# Altium PCB fullflex-2.PcbDoc
Units mil, origin at the board's own origin, x right, y up, seen from the top; angles counter-clockwise.
Board outline 1528.63 x 1229.51 mil, 4 copper layers (CuNiAu Pads, metal3, metal2, metal1), stack 25.125 mil thick; 51 components, 23 nets, 174 pads, 209 vias.
Unrouted connection lines stored in the file: 5.
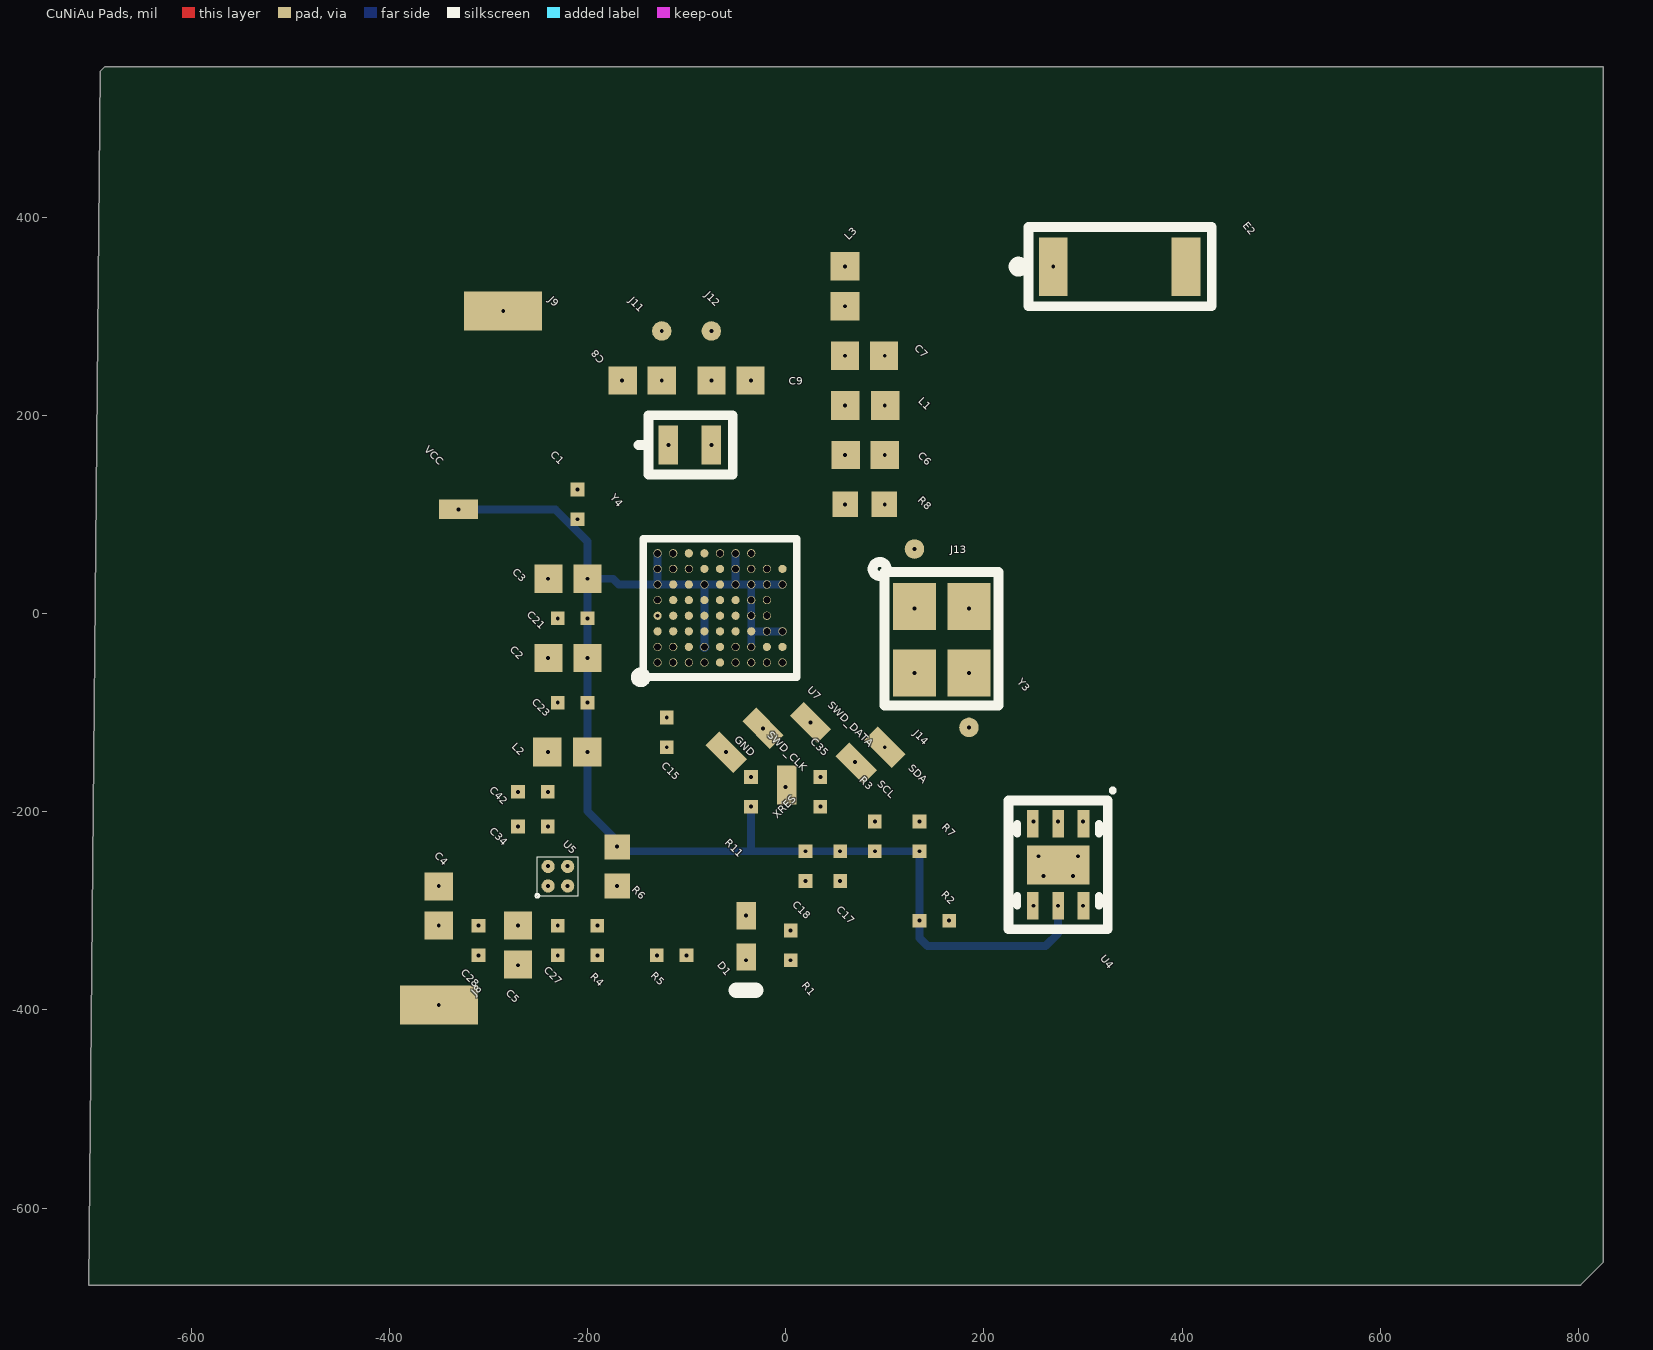
[diagram p0: CuNiAu Pads view]
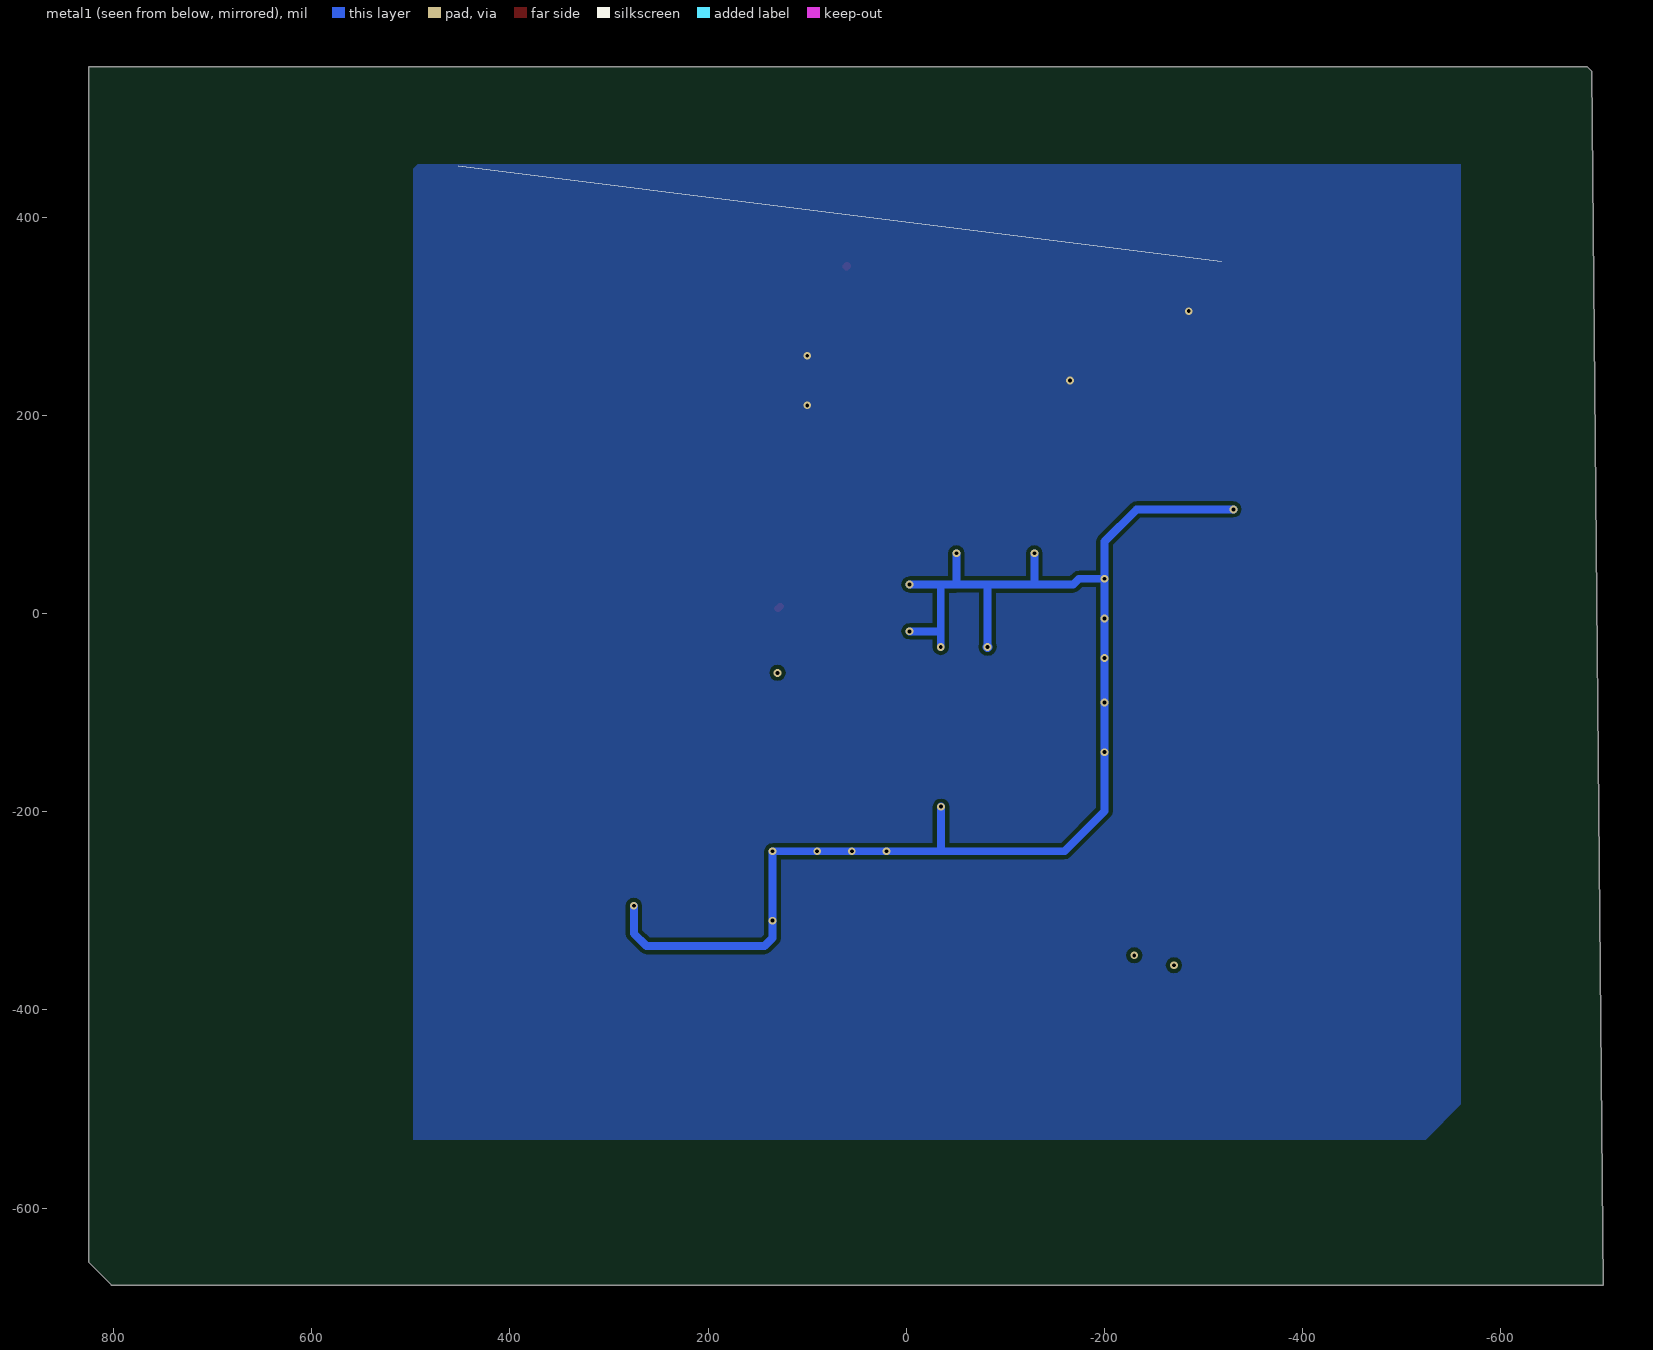
[diagram p1: metal1 view, seen from below]
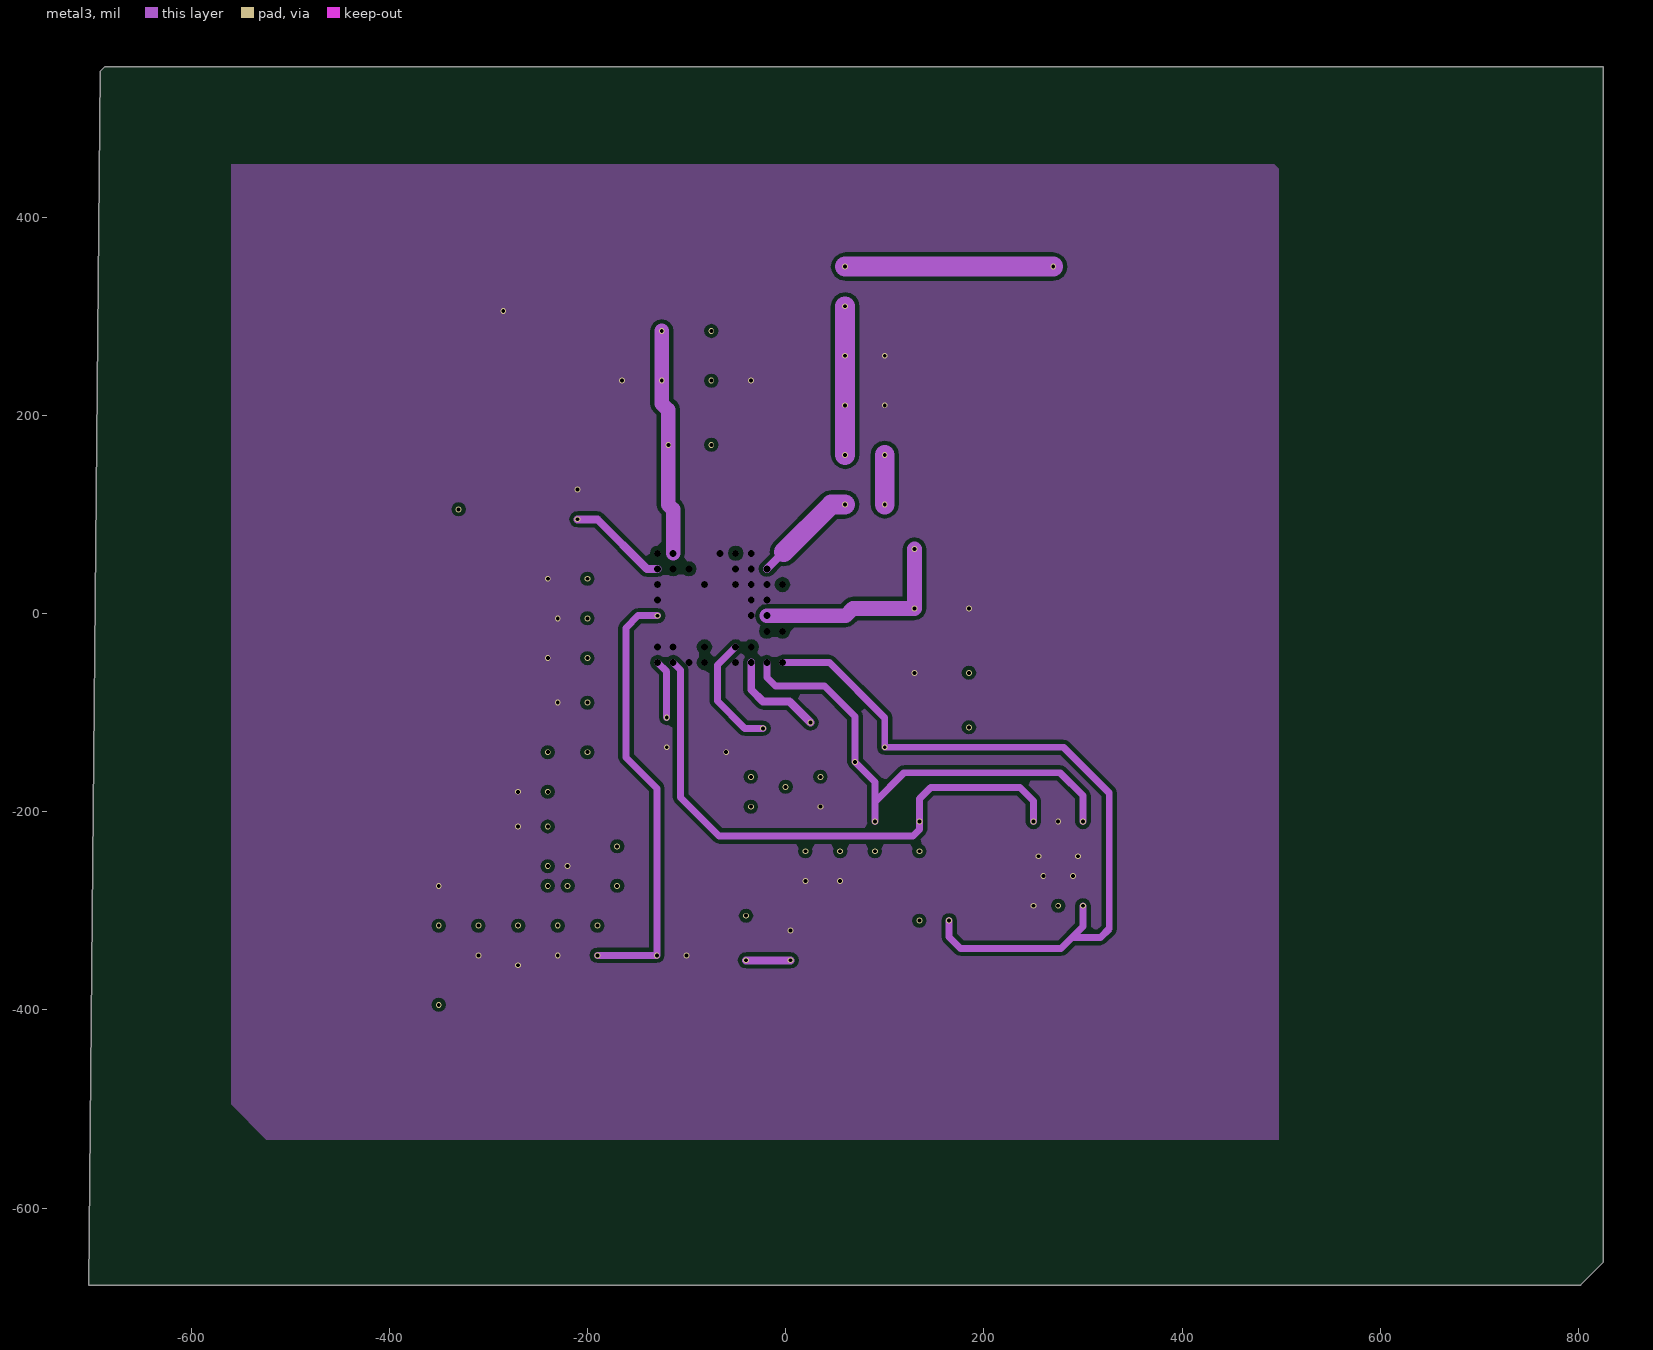
[diagram p2: metal3]
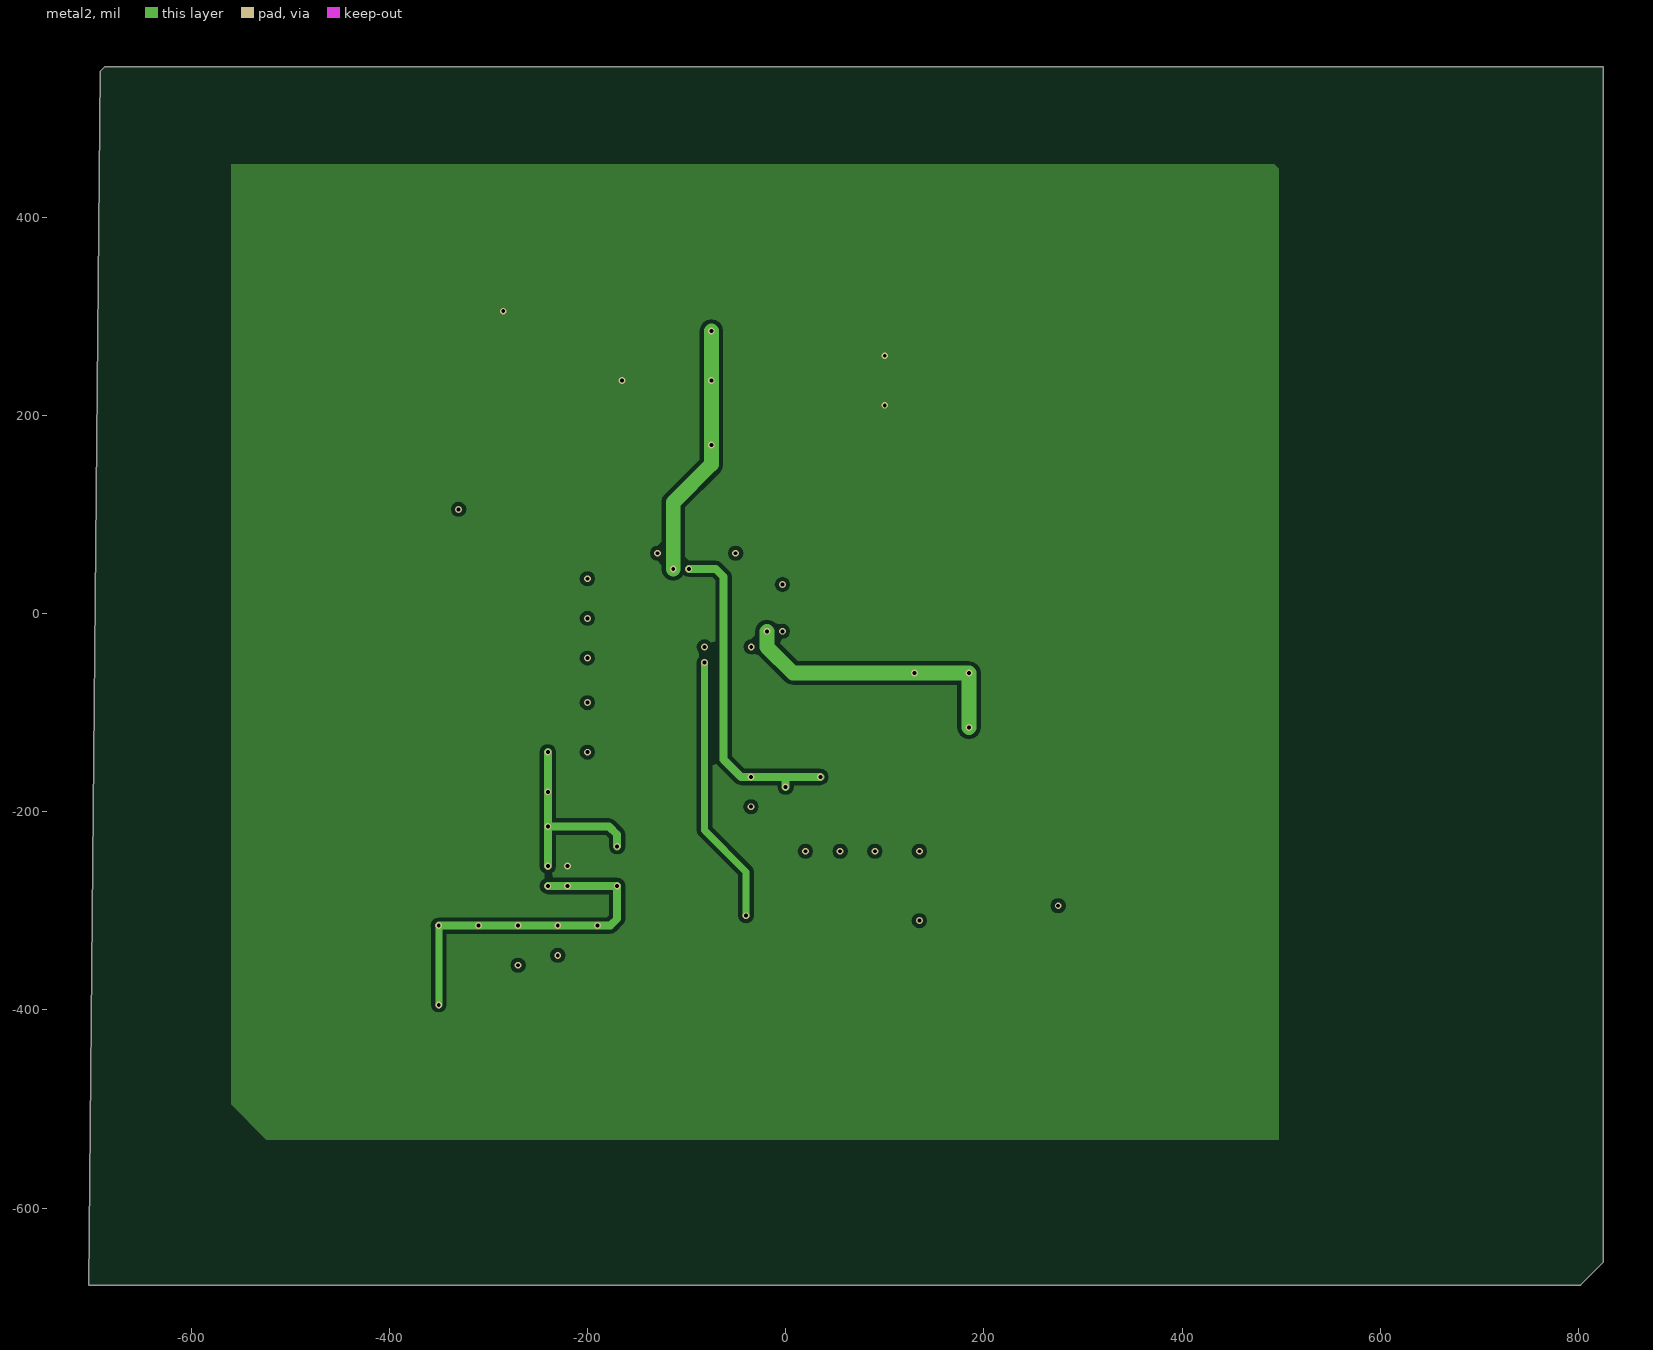
[diagram p3: metal2]

## Layer stack, top to bottom
pad expose: solder mask 0.4, Solder Resist, Dk 3.5
CuNiAu Pads: signal copper 0.035
pi4: core 10, polyimide, Dk 3.5
metal3: signal copper 0.03
pi3: core 10, polyimide, Dk 3.5
metal2: signal copper 0.03
pi2: prepreg 5, poylimide, Dk 3.5
metal1: signal copper 0.03
pi1: solder mask 0.4, Solder Resist, Dk 3.5

## Board outline
-691.85,546.89 -686.89,551.84 825.22,551.84 825.22,-654.53 802.08,-677.67 -703.41,-677.67

## Design rules (kind name [scope] priority, off if disabled: settings)
Clearance "CuNiAu Pads" [All] p1: gap=4 ignorepadtopadclearanceinfootprint=TRUE
Clearance "polygon clear" [InNetClass('All Nets') vs InNetClass('All Nets')] p2: gap=4 ignorepadtopadclearanceinfootprint=TRUE
ComponentClearance ComponentClearance_1 [InComponentClass('Top Side Components') vs InComponentClass('Top Side Components')] p1: gap=18.66 collisioncheckmode=3 verticalgap=10 showdistances=FALSE
ComponentClearance [HasFootprint('BATTERY_PAD') vs HasFootprint('POGO-PIN-PAD')] p2: gap=0 collisioncheckmode=3 verticalgap=100000 showdistances=FALSE
ComponentClearance pogoPadClearance [HasFootprint('POGO-PIN-PAD')] p3: gap=0 collisioncheckmode=3 verticalgap=10 showdistances=FALSE
DiffPairsRouting [All] p1: maxlimit=10 minlimit=3.15 mostfreqgap=3.94 toplayer_minwidth=7.01 toplayer_maxwidth=15 toplayer_prefwidth=15 midlayer1_minwidth=7.01 midlayer1_maxwidth=15 midlayer1_prefwidth=15 midlayer2_minwidth=7.01 midlayer2_maxwidth=15 midlayer2_prefwidth=15 bottomlayer_minwidth=7.01 bottomlayer_maxwidth=15 bottomlayer_prefwidth=15 maxuncoupledlength=500
FanoutControl Fanout_BGA [IsBGA] p1: bgadir=Out bgaviamode=Closest fanoutstyle=BGA fanoutdirection=OutOnly viagrid=1 // Fanout_BGA (Default Rule)
FanoutControl Fanout_Default [All] p5: bgadir=Out bgaviamode=Centered fanoutstyle=BGA fanoutdirection=Alternating viagrid=1 // Fanout_Default (Default Rule)
HoleSize [All] p1: absolutevalues=TRUE maxlimit=21.26 minlimit=1 maxpercent=80.000 minpercent=20.000
MatchedLengths MatchLengths_xSignals_U7_Y3,Y4 [InxSignalClass('xSignals_U7_Y3,Y4_MatchLengthsClass')] p1: tolerance=100 checknetsindiffpair=FALSE checkdiffpairvsdiffpair=TRUE checkxsignals=TRUE checkothers=TRUE
MatchedLengths [All] p2: tolerance=1000 checknetsindiffpair=TRUE checkdiffpairvsdiffpair=FALSE checkxsignals=FALSE checkothers=FALSE
MinimumAnnularRing [All] p1: minimumring=0
ParallelSegment [All] p1: limit=10000 gap=10
PlaneClearance [All] p1: clearance=4
PolygonConnect [All] p1: connectstyle=Direct reliefconductorwidth=10 reliefentries=4 polygonreliefangle="90 Angle" airgapwidth=10
RoutingVias [All] p1 off: holewidth=5.32 width=5.34 viastyle="Through Hole" minholewidth=5.32 minwidth=5.34 maxholewidth=7.48 maxwidth=7.91
SMDNeckDown [All] p1: percent=50.000
SolderMaskExpansion [All] p1: expansion=-1.97
UnRoutedNet [All] p1: checkbadconnections=TRUE
ViasUnderSMD [All] p1: allowed=TRUE
Width [All] p1: maxlimit=98.43 minlimit=7 preferedwidth=8 toplayer_maxwidth=9 midlayer2_maxwidth=19.68 bottomlayer_maxwidth=59.06 minimp=50.000000 maximp=50.000000 favimp=50.000000 checkconnectedcopper=TRUE
23 further rules are at their usual default settings.

## Classes and differential pairs
differential pair XTAL_LF: +XTAL_LF_P -XTAL_LF_N
differential pair XTAL_HF: +XTAL_HF_P -XTAL_HF_N

## Components (designator, comment, footprint, x,y, rotation, side; value= is the part's Value field where it differs from the comment)
C1 "Capacitance" CAP_0201(0603)_M -210,110 r90 top
C2 "Capacitance" CAP_0402(1005)_M -219.68,-45 r180 top
C3 "Capacitance" CAP_0402(1005)_M -219.68,35 r180 top
C4 "Capacitance" CAP_0402(1005)_M -350,-295.32 r90 top
C5 "Capacitance" CAP_0402(1005)_M -270,-334.68 r270 top
C6 "Capacitance" CAP_0402(1005)_M 80.31,160 r180 top
C7 "Capacitance" CAP_0402(1005)_M 79.69,260 r0 top
C8 "Capacitance" CAP_0402(1005)_M -144.68,235 r180 top
C9 "Capacitance" CAP_0402(1005)_M -55.32,235 r0 top
C15 "Capacitance" CAP_0201(0603)_M -120,-120 r270 top
C17 "Capacitance" CAP_0201(0603)_M 55,-255 r270 top
C18 "Capacitance" CAP_0201(0603)_M 20,-255 r270 top
C21 "Capacitance" CAP_0201(0603)_M -215,-5 r180 top
C23 "Capacitance" CAP_0201(0603)_M -215,-90 r180 top
C27 "Capacitance" CAP_0201(0603)_M -230,-330 r270 top
C28 "Capacitance" CAP_0201(0603)_M -310,-330 r270 top
C34 "Capacitance" CAP_0201(0603)_M -255,-215 r180 top
C35 "Capacitance" CAP_0201(0603)_M 35,-180 r270 top
C42 "Capacitance" CAP_0201(0603)_M -255,-180 r180 top
D1 "#NAME?" LED_0402(1005) -40,-325 r270 top
E2 "2450AT18B100" 2450AT18B100 270,350 r0 top
GND "*" POGO-PIN-PAD -60,-140 r45 top
J8 "*" BATTERY_PAD -350,-395 r135 top
J9 "*" BATTERY_PAD -285,305 r135 top
J11 "*" POGO-CLOCK-PAD -125,285 r45 top
J12 "*" POGO-CLOCK-PAD -75,285 r45 top
J13 "*" POGO-CLOCK-PAD 130,65 r45 top
J14 "*" POGO-CLOCK-PAD 185,-115 r45 top
L1 "Inductance" IND_0402(1005)_M 80.28,210 r180 top
L2 "Inductance" IND_0402(1005)_M -220.28,-140 r0 top
L3 "Inductance" IND_0402(1005)_M 60,330.28 r90 top
R1 "Resistance" RES_0201(0603)_M 5,-335 r90 top
R2 "Resistance" RES_0201(0603)_M 150,-310 r0 top
R3 "Resistance" RES_0201(0603)_M 90,-225 r90 top
R4 "Resistance" RES_0201(0603)_M -190,-330 r270 top
R5 "Resistance" RES_0201(0603)_M -115,-345 r0 top
R6 "Resistance" RES_0402(1005)_M -170,-255.32 r90 top
R7 "Resistance" RES_0201(0603)_M 135,-225 r270 top
R8 "Resistance" RES_0402(1005)_M 79.69,110 r0 top
R11 "Resistance" RES_0201(0603)_M -35,-180 r90 top
SCL "*" POGO-PIN-PAD 71.22,-151.18 r225 top
SDA "*" POGO-PIN-PAD 100,-135 r45 top
SWD_CLK "*" POGO-PIN-PAD -22.83,-115.91 r45 top
SWD_DATA "*" POGO-PIN-PAD 25,-110 r45 top
U4 "*" WSON-6 275,-253.66 r270 top
U5 "ADP172" ADP172 -229.84,-265.16 r90 top
U7 "*" WLCSP-68 -66.2,5.57 r90 top
VCC "*" POGO-PIN-PAD -330,105 r270 top
XRES "*" POGO-PIN-PAD 0.96,-173.35 r180 top
Y3 "ECX-2236" ECX-2236 129.88,6.93 r270 top
Y4 "32.768KHz" ABS05 -118.4,170 r0 top

## Footprints (in the part's own frame and the unit in brackets; to place one, negate y for a bottom-side part, rotate by r counter-clockwise, add the part's x,y. Pads: shape width x height; smd on the part's side, far side on the other; paste and mask are expansions set on the pad)
2450AT18B100 [mm] "2.4GHz Mini Antenna SMD, 50 ohm Resistence"
  rect 0.74x1.5 smd mask+0.03: 1(0,0) 2(3.406,0)
  silkscreen extent -1.02,-1.02 4.06,1.02, body extent -0.05,-0.9 3.35,0.9, height 1.4
ABS05 [mm] "32.768 kHz CRYSTAL 12.5 PF +/-20ppm"
  rect 0.5x1 smd mask+0.1: 1(0,0) 2(1.102,0)
  silkscreen extent -0.76,-0.76 1.65,0.76, body extent -0.25,-0.5 1.35,0.5, height 0.5
ADP172 [mm] "4-Ball WLCSP, CB-4-4"
  round 0.34 smd paste+0.01 mask+0.01: A1(-0.25,0.25) A2(0.25,0.25) B1(-0.25,-0.25) B2(0.25,-0.25)
  silkscreen extent -0.55,-0.53 0.5,0.57, body extent -0.48,-0.48 0.48,0.48, height 0.69
BATTERY_PAD [mm]
  rect 1x2 smd rot 135: 1(0,0)
CAP_0201(0603)_M [mm] "Chip Capacitor, Body 0.6x0.3mm, Height 0.33mm, IPC Low Density"
  rect 0.35x0.35 smd mask+0: 1(-0.381,0) 2(0.381,0)
  body extent -0.32,-0.17 0.31,0.16, height 0.33
CAP_0402(1005)_M [mm] "Chip Capacitor, Body 1.0x0.5mm, Height 0.6mm, IPC Low Density"
  rect 0.72x0.72 smd: 1(-0.5,0) 2(0.5,0)
  body extent -0.55,-0.3 0.55,0.3, height 0.6
ECX-2236 [mm] "48 MHz CRYSTAL 2.5X2.0mm"
  rect 1.2x1.1 smd mask+0.05: 1(0,0) 2(1.7,0) 4(0,1.4)
  rect 1.2x1.1 smd paste+0 mask+0.05: 3(1.7,1.4)
  silkscreen extent -1.14,-1.07 2.54,2.16, body extent -0.36,-0.24 2.14,1.76, height 0.8
IND_0402(1005)_M [mm] "Chip Inductor, 2-Leads, Body 1.1x0.6mm, IPC Low Density"
  rect 0.73x0.74 smd: 1(-0.515,0) 2(0.515,0)
  body extent -0.55,-0.3 0.55,0.3, height 0.45
LED_0402(1005) [mm] "SMD, 2-Leads, Body 1x0.5mm"
  rect 0.7x0.5 smd: A(-0.508,0) K(0.55,0)
  silkscreen extent 1.4,-0.25 1.4,0.25, body extent -0.5,-0.25 0.5,0.25, height 0.6
POGO-CLOCK-PAD [mm]
  round 0.5 smd: 1(0,0)
POGO-PIN-PAD [mm]
  rect 0.5x1 smd: 1(0,0)
  body extent -0.16,-0.31 0.17,0.32, height 0.33
RES_0201(0603)_M [mm] "Chip Resistor, Body 0.6x0.3mm, IPC Low Density"
  rect 0.35x0.35 smd mask-0.05: 1(-0.381,0)
  rect 0.35x0.35 smd mask-0.5: 2(0.381,0)
  body extent -0.31,-0.16 0.31,0.16, height 0.3
RES_0402(1005)_M [mm] "Chip Resistor, 2-Leads, Body 1.05x0.55mm, IPC Low Density"
  rect 0.65x0.65 smd: 1(-0.5,0) 2(0.5,0)
  body extent -0.53,-0.28 0.53,0.28, height 0.4
WLCSP-68 [mm] "PSOC 4 BLE CY8C4247FNI-BL483 N40P8X9_352X391X55"
  round 0.21 smd mask+0: A1(-1.4,1.6) A2(-1,1.6) A3(-0.6,1.6) A4(-0.2,1.6) A5(0.2,1.6) A6(0.6,1.6) A7(1,1.6) A8(1.4,1.6) B1(-1.4,1.2) B2(-1,1.2) B3(-0.6,1.2) B4(-0.2,1.2) B5(0.2,1.2) B6(0.6,1.2) B7(1,1.2) B8(1.4,1.2) C1(-1.4,0.8) C2(-1,0.8) C3(-0.6,0.8) C5(0.2,0.8) C6(0.6,0.8) C7(1,0.8) C8(1.4,0.8) D1(-1.4,0.4) D2(-1,0.4) D3(-0.6,0.4) D4(-0.2,0.4) D5(0.2,0.4) D6(0.6,0.4) D7(1,0.4) D8(1.4,0.4) E1(-1.4,0) E2(-1,0) E3(-0.6,0) E4(-0.2,0) E5(0.2,0) E6(0.6,0) E7(1,0) E8(1.4,0) F1(-1.4,-0.4) F2(-1,-0.4) F3(-0.6,-0.4) F4(-0.2,-0.4) F5(0.2,-0.4) F6(0.6,-0.4) F7(1,-0.4) F8(1.4,-0.4) G1(-1.4,-0.8) G2(-1,-0.8) G3(-0.6,-0.8) G4(-0.2,-0.8) G5(0.2,-0.8) G6(0.6,-0.8) G7(1,-0.8) G8(1.4,-0.8) H1(-1.4,-1.2) H2(-1,-1.2) H3(-0.6,-1.2) H4(-0.2,-1.2) H5(0.2,-1.2) H6(0.6,-1.2) H7(1,-1.2) J1(-1.4,-1.6) J2(-1,-1.6) J3(-0.6,-1.6) J6(0.6,-1.6) J7(1,-1.6)
  round 0.21 smd mask-0.05: C4(-0.2,0.8)
  silkscreen extent -1.9,-1.97 1.77,2.16, body extent -1.77,-1.97 1.77,1.97, height 0.55
WSON-6 [mm] "SON, 6-Leads, Body 2x2mm, Pitch 0.65mm, Thermal Pad 1X1.6mm"
  rect 0.7x0.3 smd: 1(-1.05,0.65) 2(-1.05,0) 3(-1.05,-0.65) 4(1.05,-0.65) 5(1.05,0) 6(1.05,0.65)
  rect 1x1.6 smd: 7(0,0)
  silkscreen extent -1.95,-1.27 1.65,1.45, body extent -1,-1 1,1, height 0.8

## Part data
C1 C15 C17 C18 C21 C23 C27 C28 C34 C35 C42: library part C-0201(0603), "___ OHM ___ mW 0201(0603) SMD"
C2 C3 C4 C5 C6 C7 C8 C9: library part C-0402(1005), "___ OHM ___ mW 0402(1005) SMD"
D1: library part LED_0402(1005), "LED, 0402(1005) SMD"
E2: "2.4 GHz BLE Antenna", Case/Package=CSMD, Frequency=2.45GHz, Manufacturer=Johanson, Manufacturer Part Number=2450AT18B100E, Max Frequency=2.5GHz, Max Power Dissipation=3W, Package Quantity=1, Supplier Part Number 1=712-1006-1-ND, Bandwidth=100MHz, ComponentLink1Description=https://datasheet.ciiva.com/1124/1318299-1124918.pdf, ComponentLink1URL=https://datasheet.ciiva.com/1124/1318299-1124918.pdf, ComponentLink2Description=https://datasheet.ciiva.com/24025/antenna-2450at18b100-242422-24025839.pdf, ComponentLink2URL=https://datasheet.ciiva.com/24025/antenna-2450at18b100-242422-24025839.pdf, Contact Plating=Tin, Description 1="JOHANSON TECHNOLOGY         2450AT18B100E             ANTENNA, CERAMIC, 2.45GHZ", Gain=-0.5dB, Height=0.051inch, Impedance=50R, Length=3.2mm, Mount="Surface Mount", Number of Bands=1, Packaging="Tape and Reel", Power Rating=3W, Pricing 1="1=0.62, 10=0.541, 25=0.4788, 100=0.4172, 250=0.3631, 500=0.309, 1000=0.2472 (USD)", REACH SVHC="No SVHC", Return Loss=-9.5dB, Stock 1=187598, Supplier 1=Digi-Key, Termination=Solder, Width=1.6mm
GND SCL SDA SWD_CLK SWD_DATA VCC XRES: library part "Probe-Pin Pad"
J8 J9: library part Battery_Connector
J11 J12 J13 J14: library part Probe-CLOCK
L1 L3: library part I-0402(1005)
L2: library part "Inductor Iron", "Magnetic-Core Inductor"
R1 R2 R3 R4 R5 R7 R11: library part R-0201(0603), "___ OHM ___ mW 0201(0603) SMD"
R6 R8: library part R-0402(1005), "___ OHM ___ mW 0402(1005) SMD"
U4: library part TMP116, "TI Digital I2C Temperature Sensor", Manufacturer="Texas Instruments", Manufacturer Part Number=TMP116AIDRVT, Max Operating Temperature=150°C, Min Operating Temperature=-55°C, Supplier Part Number 1=296-46944-1-ND, Interface=I2C,SMBus,2-Wire, Pricing 1="1=4.01, 10=3.599, 100=2.9485 (USD)", Stock 1=995, Supplier 1=Digi-Key
U5: "3V LDO", Dropout Voltage=50mV, Manufacturer="Analog Devices", Manufacturer Part Number=ADP172ACBZ-3.0-R7, Max Input Voltage=3.6V, Max Operating Temperature=125°C, Max Output Current=300mA, Max Output Voltage=3V, Max Supply Current=170uA, Min Current Limit=400mA, Min Input Voltage=1.6V, Min Operating Temperature=-40°C, Min Output Voltage=800mV, Nominal Supply Current=23uA, Package Quantity=3000, Power Supply Rejection Ratio (PSRR)=73dB, Quiescent Current=60uA, Supplier Part Number 1=ADP172ACBZ-3.0-R7CT-ND, ComponentLink1Description=https://datasheet.ciiva.com/2056/adp172-2056690.pdf, ComponentLink1URL=https://datasheet.ciiva.com/2056/adp172-2056690.pdf, ComponentLink2Description=https://datasheet.ciiva.com/2056/adp172-2056691.pdf, ComponentLink2URL=https://datasheet.ciiva.com/2056/adp172-2056691.pdf, ComponentLink3Description=https://datasheet.ciiva.com/2056/adp172-2056692.pdf, ComponentLink3URL=https://datasheet.ciiva.com/2056/adp172-2056692.pdf, ComponentLink4Description=https://datasheet.ciiva.com/3224/adp172-3224693.pdf, ComponentLink4URL=https://datasheet.ciiva.com/3224/adp172-3224693.pdf, ComponentLink5Description=https://datasheet.ciiva.com/17365/adp172-17365245.pdf, ComponentLink5URL=https://datasheet.ciiva.com/17365/adp172-17365245.pdf, ComponentLink6Description=https://datasheet.ciiva.com/48694/001251525-da-01-en-ic-reg-ldo-adp172acbz-3-0-r7-wlcsp-4-adi-48694412.pdf, ComponentLink6URL=https://datasheet.ciiva.com/48694/001251525-da-01-en-ic-reg-ldo-adp172acbz-3-0-r7-wlcsp-4-adi-48694412.pdf, Contact Plating=Copper,Tin,Silver, Description 1="Linear Voltage Regulator IC Positive Fixed 1 Output 3V 300mA 4-WLCSP (0.95x1.03)", Lead Free="Contains Lead", Mount="Surface Mount", Number of Outputs=1, Number of Pins=4, Number of Regulators=1, Operating Supply Current=23uA, Output Current=300mA, Output Voltage=3V, Packaging="Tape and Reel", Polarity=Positive, Pricing 1="1=1.13, 10=1.013, 100=0.7896, 500=0.6523, 1000=0.515 (USD)", Radiation Hardening=No, Stock 1=438, Supplier 1=Digi-Key
U7: library part CY8C4127FNI-BL483, "PSOC 4 CYBLE", Frequency=48MHz, Manufacturer=Cypress, Manufacturer Part Number=CY8C4247FNI-BL483T, Max Operating Temperature=85°C, Max Supply Voltage=5.5V, Min Operating Temperature=-40°C, Min Supply Voltage=1.71V, Package Quantity=2000, Supplier Part Number 1=428-4490-ND, ComponentLink1Description=http://www.cypress.com/?docID=50617, ComponentLink1URL=http://www.cypress.com/?docID=50617, ComponentLink2Description=http://www.cypress.com/file/137466/download, ComponentLink2URL=http://www.cypress.com/file/137466/download, Contact Plating=Copper,Tin,Silver, Core Architecture=ARM, Data Bus Width=32b, Interface=I2C,SPI,I2S,IrDA,SSP,UART,USART,LIN, Lead Free="Lead Free", Max Frequency=48MHz, Memory Size=128KB, Memory Type=FLASH, Mount="Surface Mount", Number of I/Os=36, Number of Programmable I/O=36, Number of Timers/Counters=4, Oscillator Type=Internal, Packaging="Tape and Reel", Peripherals="Brown-out Detect/Reset,POR,PWM,WDT,LVD,LCD", Pricing 1="1=7.05, 10=6.345, 25=5.7812, 100=5.217, 250=4.794, 500=4.371, 1000=3.807, 2500=3.666 (USD)", RAM Size=16KB, Stock 1=250, Supplier 1=Digi-Key, Watchdog Timer=Yes
Y3: "24 MHz Crystal", Case/Package=SMD/SMT, ESR (Equivalent Series Resistance)=60R, Frequency=24MHz, Frequency Stability=10ppm, Load Capacitance=8pF, Manufacturer="ECS International", Manufacturer Part Number=ECS-240-8-36CKM-TR, Max Operating Temperature=70°C, Min Operating Temperature=-20°C, Package Quantity=1000, Supplier Part Number 1=XC1557CT-ND, ComponentLink1Description=http://www.ecsxtal.com/store/pdf/partnumber4.pdf, ComponentLink1URL=http://www.ecsxtal.com/store/pdf/partnumber4.pdf, ComponentLink2Description=http://www.mouser.com/ds/2/122/ECX-2236-15751.pdf, ComponentLink2URL=http://www.mouser.com/ds/2/122/ECX-2236-15751.pdf, Description 1="Crystals 24MHz 10ppm", Frequency Tolerance=10ppm, Height=0.026inch, Length=0.098inch, Mount="Surface Mount", Packaging="Tape and Reel", Pricing 1="1=1.12, 10=0.987, 50=0.9224, 100=0.8151, 500=0.7722 (USD)", Stock 1=30313, Supplier 1=Digi-Key, Termination=SMD/SMT, Tolerance=10ppm, Width=0.079inch
Y4: library part ABS05, "Crystal Oscillator", Case/Package=SMD/SMT, ESR (Equivalent Series Resistance)=90kR, Frequency=32.768kHz, Frequency Tolerance=20ppm, Load Capacitance=12.5pF, Manufacturer=Abracon, Manufacturer Part Number=ABS05-32.768KHZ-T, Max Operating Temperature=85°C, Min Operating Temperature=-40°C, Package Quantity=3000, Supplier Part Number 1=535-11899-1-ND, ComponentLink1Description=https://datasheet.ciiva.com/23810/abs05-23810480.pdf, ComponentLink1URL=https://datasheet.ciiva.com/23810/abs05-23810480.pdf, ComponentLink2Description=https://datasheet.ciiva.com/6728/abs05-6728949.pdf, ComponentLink2URL=https://datasheet.ciiva.com/6728/abs05-6728949.pdf, ComponentLink3Description=https://datasheet.ciiva.com/6728/abs05-6728950.pdf, ComponentLink3URL=https://datasheet.ciiva.com/6728/abs05-6728950.pdf, ComponentLink4Description=https://datasheet.ciiva.com/16411/abs05-16411149.pdf, ComponentLink4URL=https://datasheet.ciiva.com/16411/abs05-16411149.pdf, Depth=1mm, Description 1="32.768kHz ±20ppm Crystal 12.5pF 90 kOhm -40°C ~ 85°C  Surface Mount 2-SMD", Height=0.02inch, Lead Free="Lead Free", Length=1.6mm, Mount="Surface Mount", Number of Pins=2, Packaging="Tape and Reel", Pricing 1="1=1.03, 10=0.911, 50=0.8514, 100=0.7524, 500=0.7128, 1000=0.594 (USD)", Radiation Hardening=No, REACH SVHC="No SVHC", Series Resistance=90kR, Stock 1=92285, Supplier 1=Digi-Key, Termination=SMD/SMT, Tolerance=20ppm, Width=0.039inch

## Free pads (board coordinates)
  round 0 all layers, no hole paste+0 mask+0: 1(-174.54,171.49) 1(-121.18,169.71) 1(-121.18,169.71) 1(-98.99,91.92) 1(-88.05,91.92) 1(-77.78,169.71) 1(-77.78,169.71) 1(-77.78,169.71) 1(127.28,7.07) 1(182.4,-59.86)

## Via types
v1: diameter 5.34/5.91 (per signal layer), hole 3.94, CuNiAu Pads to metal3, 99 vias
v2: diameter 5.91/6.89 (per signal layer), hole 3.94, metal3 to metal2, 47 vias
v3: diameter 5.34/5.91 (per signal layer), hole 7.01, CuNiAu Pads to metal3, 37 vias
v4: diameter 6.89/7.87 (per signal layer), hole 3.94, metal2 to metal1, 26 vias

## Nets (pads, with @x,y where several pads share a name; then routed paths per layer and width w, separated by ;. In a path a pad name is that pad's centre, name@x,y a point inside that pad or via, vN(x,y) a via of type N, cw(c..) or ccw(c..) an arc to the next point about the centre after c; other vN are vias at no path point)
ALERT: R7.1 U4.3 U7.B1 | length 576.2
  metal3 w7.01: v3(-113.44,-49.55) -106.07,-56.93 -106.07,-185.61 -67.1,-224.57 128.46,-224.57 135,-218.03 v1(135,-210) 135,-186.98 146.4,-175.58 236.33,-175.58 250,-189.26 v1(250,-210)
ANTENNA: R8.1 U7.H7 | length 105.9
  metal3 w8: v3(-18.96,44.94) -1.95,61.95
  metal3 w20: -1.95,61.95 46.11,110 v1(60,110)
BATTERY_LEVEL: R4.2 R5.1 U7.A4 | length 440.2
  metal3 w7.01: v1(-190,-345) v1(-130,-345) -130,-176.44 -161.03,-145.41 -161.03,-14.48 -148.85,-2.31 v1(-129.19,-2.31)
GND: C1.2 C2.2 C3.2 C4.2 C5.2 C7.2 C8.2 C9.2 C15.2 C17.2 C18.2 C21.2 C23.2 C27.2 C28.2 C34.2 C35.2 C42.2 GND.1 J9.1 L1.1 R1.2 R5.2 U4.2 U4.4 U4.7 U5.B2 U7.A2 U7.A5 U7.A6 U7.B2 U7.C1 U7.D6 U7.E8 U7.F1 U7.F6 U7.F7 U7.G4 U7.G5 U7.G6 U7.G7 U7.G8 U7.H5 U7.H6 Y3.2 Y3.4 | length 0
  other v1: -270,-355 -310,-345 -230,-345 -100,-345 5,-320 250,-295 -350,-275 20,-270 55,-270 260,-265 290,-265 -220,-255 255,-245 295,-245 -270,-215 275,-210 35,-195 -270,-180 -60,-140 -120,-135 -230,-90 130,-60 -240,-45 -230,-5 185,5 -240,35 -210,125 100,210 -165,235 -35,235 100,260 -285,305
  other v2: -220,-255
  other v3: -97.7,-49.55 -50.45,-49.55 -129.19,-33.8 -113.45,-33.8 -34.71,-2.3 -129.19,13.44 -34.7,13.44 -18.96,13.44 -129.19,29.19 -81.95,29.19 -50.45,29.19 -34.71,29.19 -18.96,29.19 -50.45,44.94 -34.71,44.94 -66.2,60.69 -34.71,60.69
  other v4: 100,210 -165,235 100,260 -285,305
LED_RED: D1.A U7.D1 | length 272.8
  metal2 w7.01: v2(-81.95,-49.55) -81.95,-218.77 -40,-260.72 v2(-40,-305)
  other v1: -40,-305
  other v3: -81.95,-49.55
NetC6_1: C6.1 R8.2 | length 50
  metal3 w20: v1(100,110) v1(100,160)
NetC6_2: C6.2 C7.1 L1.2 L3.1 | length 150
  metal3 w20: v1(60,160) v1(60,210) v1(60,260) v1(60,310)
NetC34_1: C34.1 C42.1 L2.1 R6.2 U5.A2 | length 200.2
  metal2 w8: v2(-240,-255) v2(-240,-215) ; v1(-240,-140) v1(-240,-180) v2(-240,-215) ; v2(-170,-235) -170,-223.23 -178.23,-215 v2(-240,-215)
  other v1: -240,-255 -170,-235 -240,-215
  other v2: -240,-180 -240,-140
NetD1_K: D1.K R1.1 | length 45
  metal3 w8: v1(-40,-350) v1(5,-350)
NetE2_1: E2.1 L3.2 | length 210.8
  CuNiAu Pads w8: L3.2 60.28,350.28 L3.2@60.55,350
  metal3 w20: v1(60,350) v1(270,350)
SCL: R3.2 SCL.1 U4.1 U7.H1 | length 492.7
  metal3 w7.01: v3(-18.96,-49.55) -18.96,-64.72 -10.41,-73.26 39.39,-73.26 70,-103.87 v1(70,-150) 90,-170 90,-190.31 ; v1(90,-210) 90,-190.31 ; v1(300,-210) 300,-183.88 276.89,-160.76 119.54,-160.76 90,-190.31
SDA: R2.2 SDA.1 U4.6 U7.J1 | length 766.1
  metal3 w7.01: v3(-3.21,-49.55) 44.24,-49.55 100,-105.31 v1(100,-135) 280.22,-135 326.52,-181.3 326.52,-318.2 317.72,-326.99 289.01,-326.99 ; v1(165,-310) 165,-326.49 176.49,-337.98 278.03,-337.98 289.01,-326.99 ; v1(300,-295) 300,-316.01 289.01,-326.99
SWD_CLK: SWD_CLK.1 U7.F2 | length 119.5
  metal3 w7.01: v3(-50.45,-33.8) -68.76,-52.11 -68.76,-88.39 -41.25,-115.91 v1(-22.83,-115.91)
SWD_DATA: SWD_DATA.1 U7.G1 | length 100.8
  metal3 w8: v3(-34.71,-49.55) -34.71,-76.92 -22.77,-88.86 3.86,-88.86 v1(25,-110)
V_BATT: C4.1 C5.1 C27.1 C28.1 J8.1 R4.1 R6.1 U5.A1 U5.B1 | length 365.9
  metal2 w7: v2(-350,-395) v1(-350,-315)
  metal2 w8: v1(-350,-315) v1(-310,-315) v1(-270,-315) v1(-230,-315) v1(-190,-315) -176.93,-315 -170,-308.07 v1(-170,-275) v2(-220,-275) v1(-240,-275)
  other v1: -350,-395 -220,-275
  other v2: -350,-315 -310,-315 -270,-315 -230,-315 -190,-315 -240,-275 -170,-275
VCC: C2.1 C3.1 C17.1 C18.1 C21.1 C23.1 L2.2 R2.1 R3.1 R7.2 R11.1 U4.5 U7.A8 U7.D2 U7.F8 U7.G2 U7.J3 U7.J6 VCC.1 | length 1496.4
  metal1 w8: v4(-330,105) -232.41,105 -200,72.59 v1(-200,35) ; v4(-129.19,60.69) -129.19,29.19 ; v4(-81.95,-33.8) -81.95,29.19 ; v4(-50.45,60.69) -50.45,29.19 ; v1(-35,-195) -35,-239.74 -34.74,-240 ; v4(-34.71,-33.8) -34.71,-17 ; v4(-3.21,-18.05) -33.65,-18.05 -34.71,-17 ; v4(-3.21,29.19) -34.71,29.19 ; v1(275,-295) 275,-322.88 262.32,-335.55 143.14,-335.55 135,-327.42 v1(135,-310) v1(135,-240) v1(90,-240) v4(55,-240) v4(20,-240) -34.74,-240 ; v1(-200,35) -174.24,35 -168.43,29.19 -129.19,29.19 ; v1(-200,35) v1(-200,-5) v1(-200,-45) v1(-200,-90) v2(-200,-140) -200,-199.48 -159.48,-240 -34.74,-240 ; -129.19,29.19 -81.95,29.19 ; -81.95,29.19 -50.46,29.19 ; -50.45,29.19 -34.71,29.19 ; -34.71,-17 -34.71,29.19
  other v1: 20,-240 55,-240 -200,-140 -330,105
  other v2: 135,-310 275,-295 20,-240 55,-240 90,-240 135,-240 -35,-195 -200,-90 -200,-45 -81.95,-33.8 -34.71,-33.8 -3.21,-18.05 -200,-5 -3.21,29.19 -200,35 -129.19,60.69 -50.45,60.69 -330,105
  other v3: -81.95,-33.8 -34.71,-33.8 -3.21,-18.05 -3.21,29.19 -129.19,60.69 -50.45,60.69
  other v4: 135,-310 275,-295 90,-240 135,-240 -35,-195 -200,-140 -200,-90 -200,-45 -200,-5 -200,35
VCCD: C1.1 U7.A7 | length 101.5
  metal3 w8: v1(-210,95) -190,95 -139.94,44.94 v3(-129.19,44.94)
VREF: C15.1 U7.A1 | length 59.3
  metal3 w7.01: v3(-129.19,-49.55) -120,-58.74 v1(-120,-105)
XRES: C35.1 R11.2 U7.C7 XRES.1 | length 337.7
  metal2 w8: v3(-97.7,44.94) -70.51,44.94 -62.62,37.05 -62.62,-147.37 -44.99,-165 v1(-35,-165) 0,-165 ; v2(0,-175) 0,-165 ; v2(35,-165) 0,-165
  other v1: 0,-175 35,-165
  other v2: -35,-165 -97.7,44.94
XTAL_HF_N: J14.1 pad.1@182.4,-59.86 U7.H3 Y3.3 | length 285.6
  metal2 w15: v3(-18.96,-18.05) -18.96,-33.8 7.24,-60 v2(185,-60) v2(185,-115)
  other v1: 185,-115 185,-60
  other v2: -18.96,-18.05
  other v4: 130,-60
XTAL_HF_P: J13.1 pad.1@127.28,7.07 U7.H4 Y3.1 | length 215.8
  CuNiAu Pads w7.01: Y3.1@127.11,7.24 128.65,5.7 129.35,5 129.88,5 v1(130,5)
  metal3 w15: v3(-18.96,-2.3) 60.52,-2.3 67.82,5 v1(130,5) v1(130,65)
XTAL_LF_N: C9.1 J12.1 pad.1@-77.78,169.71 pad.1@-88.05,91.92 U7.B7 Y4.2 | length 256
  metal2 w15: v3(-113.45,44.94) -113.45,112.01 -75,150.45 v1(-75,170) v1(-75,235) v1(-75,285)
  other v2: -113.45,44.94 -75,170 -75,235 -75,285
XTAL_LF_P: C8.1 J11.1 pad.1@-98.99,91.92 pad.1@-121.18,169.71 pad.1@-174.54,171.49 U7.B8 Y4.1 | length 229.1
  metal3 w15: v1(-125,285) v1(-125,235) -125,211.73 -118.4,205.13 v1(-118.4,170) -118.4,109.66 -113.45,104.7 v3(-113.45,60.69)
pads on no net: E2.2 U7.A3 U7.B3 U7.B4 U7.B5 U7.B6 U7.C2 U7.C3 U7.C4 U7.C5 U7.C6 U7.C8 U7.D3 U7.D4 U7.D5 U7.D7 U7.D8 U7.E1 U7.E2 U7.E3 U7.E4 U7.E5 U7.E6 U7.E7 U7.F3 U7.F4 U7.F5 U7.G3 U7.H2 U7.J2 U7.J7
copper on no net:
  other v4: -270,-355 -230,-345

## Polygon pours and split planes (outlines as drawn)
GND on metal3 "GND_METAL_3" (solid, remove dead copper, pour order 2): -559.65,453.21 -559.65,-495.26 -523.94,-530.97 497.38,-530.97 497.38,448.93 493.09,453.21
GND on metal2 "GND_METAL_2" (solid, remove dead copper, pour order 4): -559.65,453.21 -559.65,-495.26 -523.94,-530.97 497.38,-530.97 497.38,448.93 493.09,453.21
GND on metal1 "GND_METAL_1" (solid, remove dead copper, pour order 6): -559.65,453.21 -559.65,-495.26 -523.94,-530.97 497.38,-530.97 497.38,448.93 493.09,453.21

## Silkscreen, mask and mechanical layers (free items; w line width, h text height)
Bottom Overlay:
  lines w0.5: -317.97,354.91 452.03,451.05
Mechanical 1:
  lines w0.5: -475.8,26.12 0.7,638.57 -475.8,26.12